# Altium PCB Main.PcbDoc (part 1 of 2)
Units mil, origin at the board's own origin, x right, y up, seen from the top; angles counter-clockwise.
Board outline 5500 x 5000 mil, 4 copper layers (Top Layer, Gnd 1, Interconnects, Gnd 2), stack 65.2 mil thick; 154 components, 128 nets, 570 pads, 1105 vias.
Unrouted connection lines stored in the file: 1.
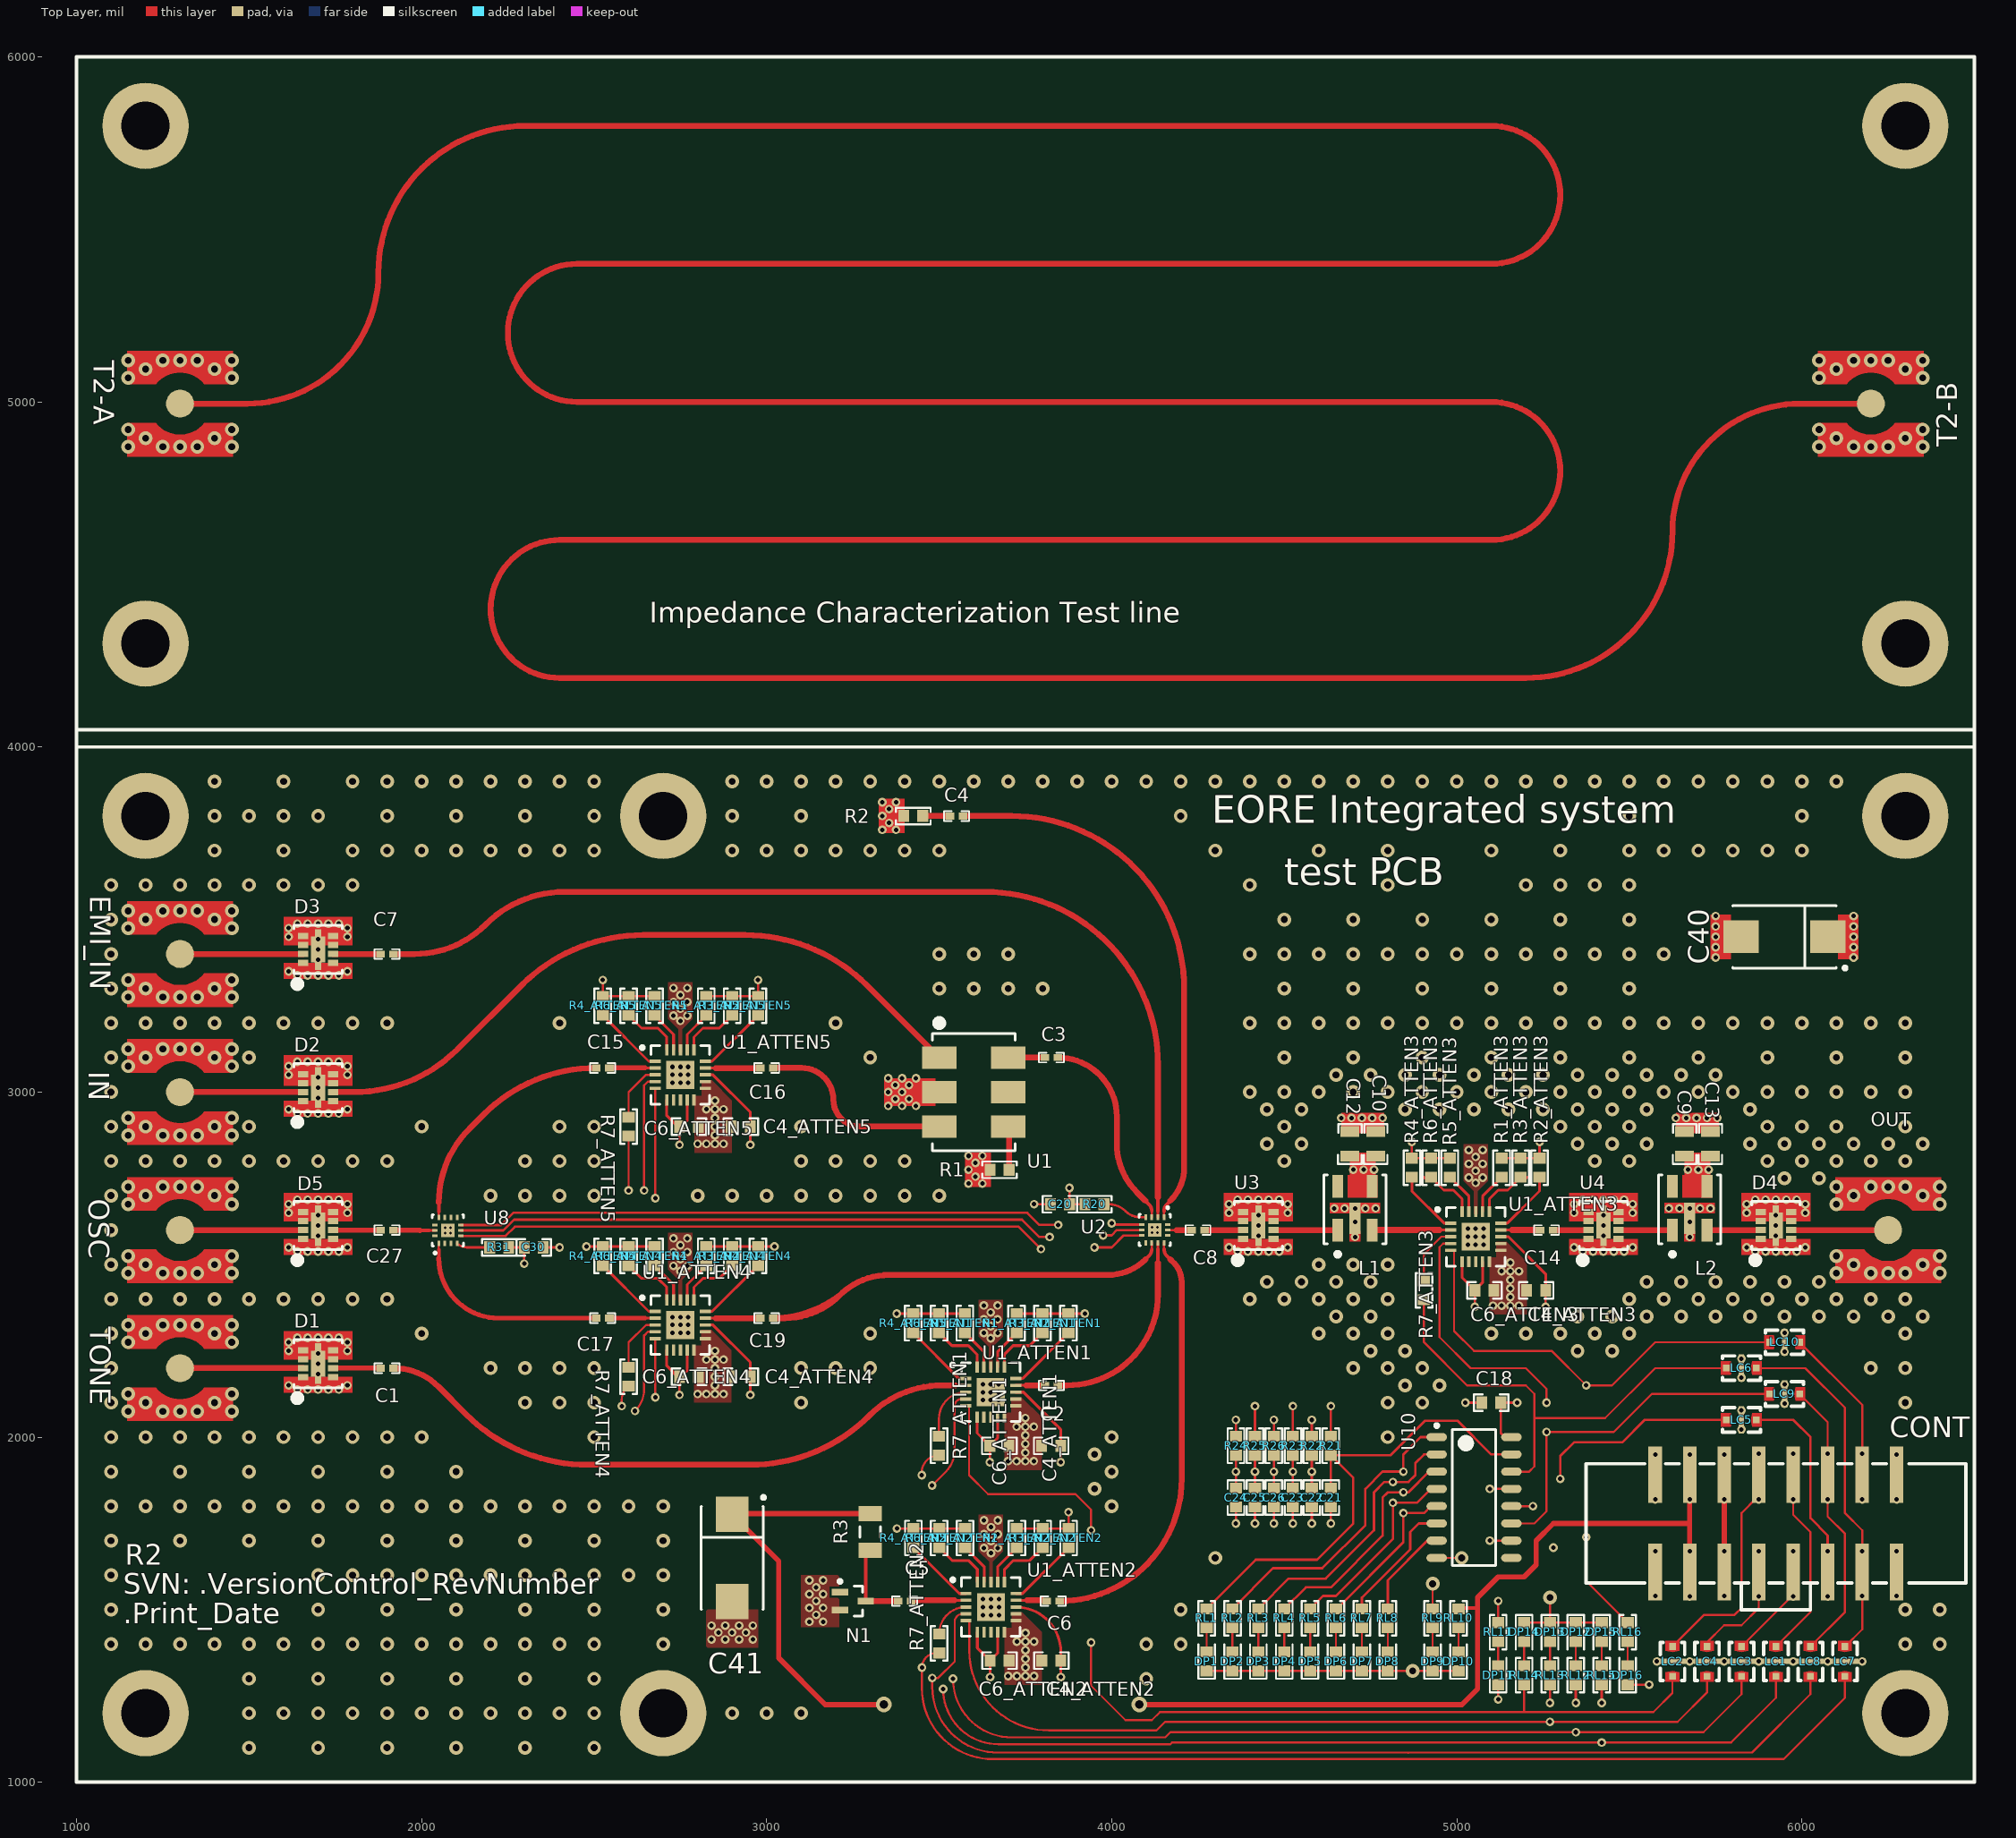
[diagram p0: Top Layer view]
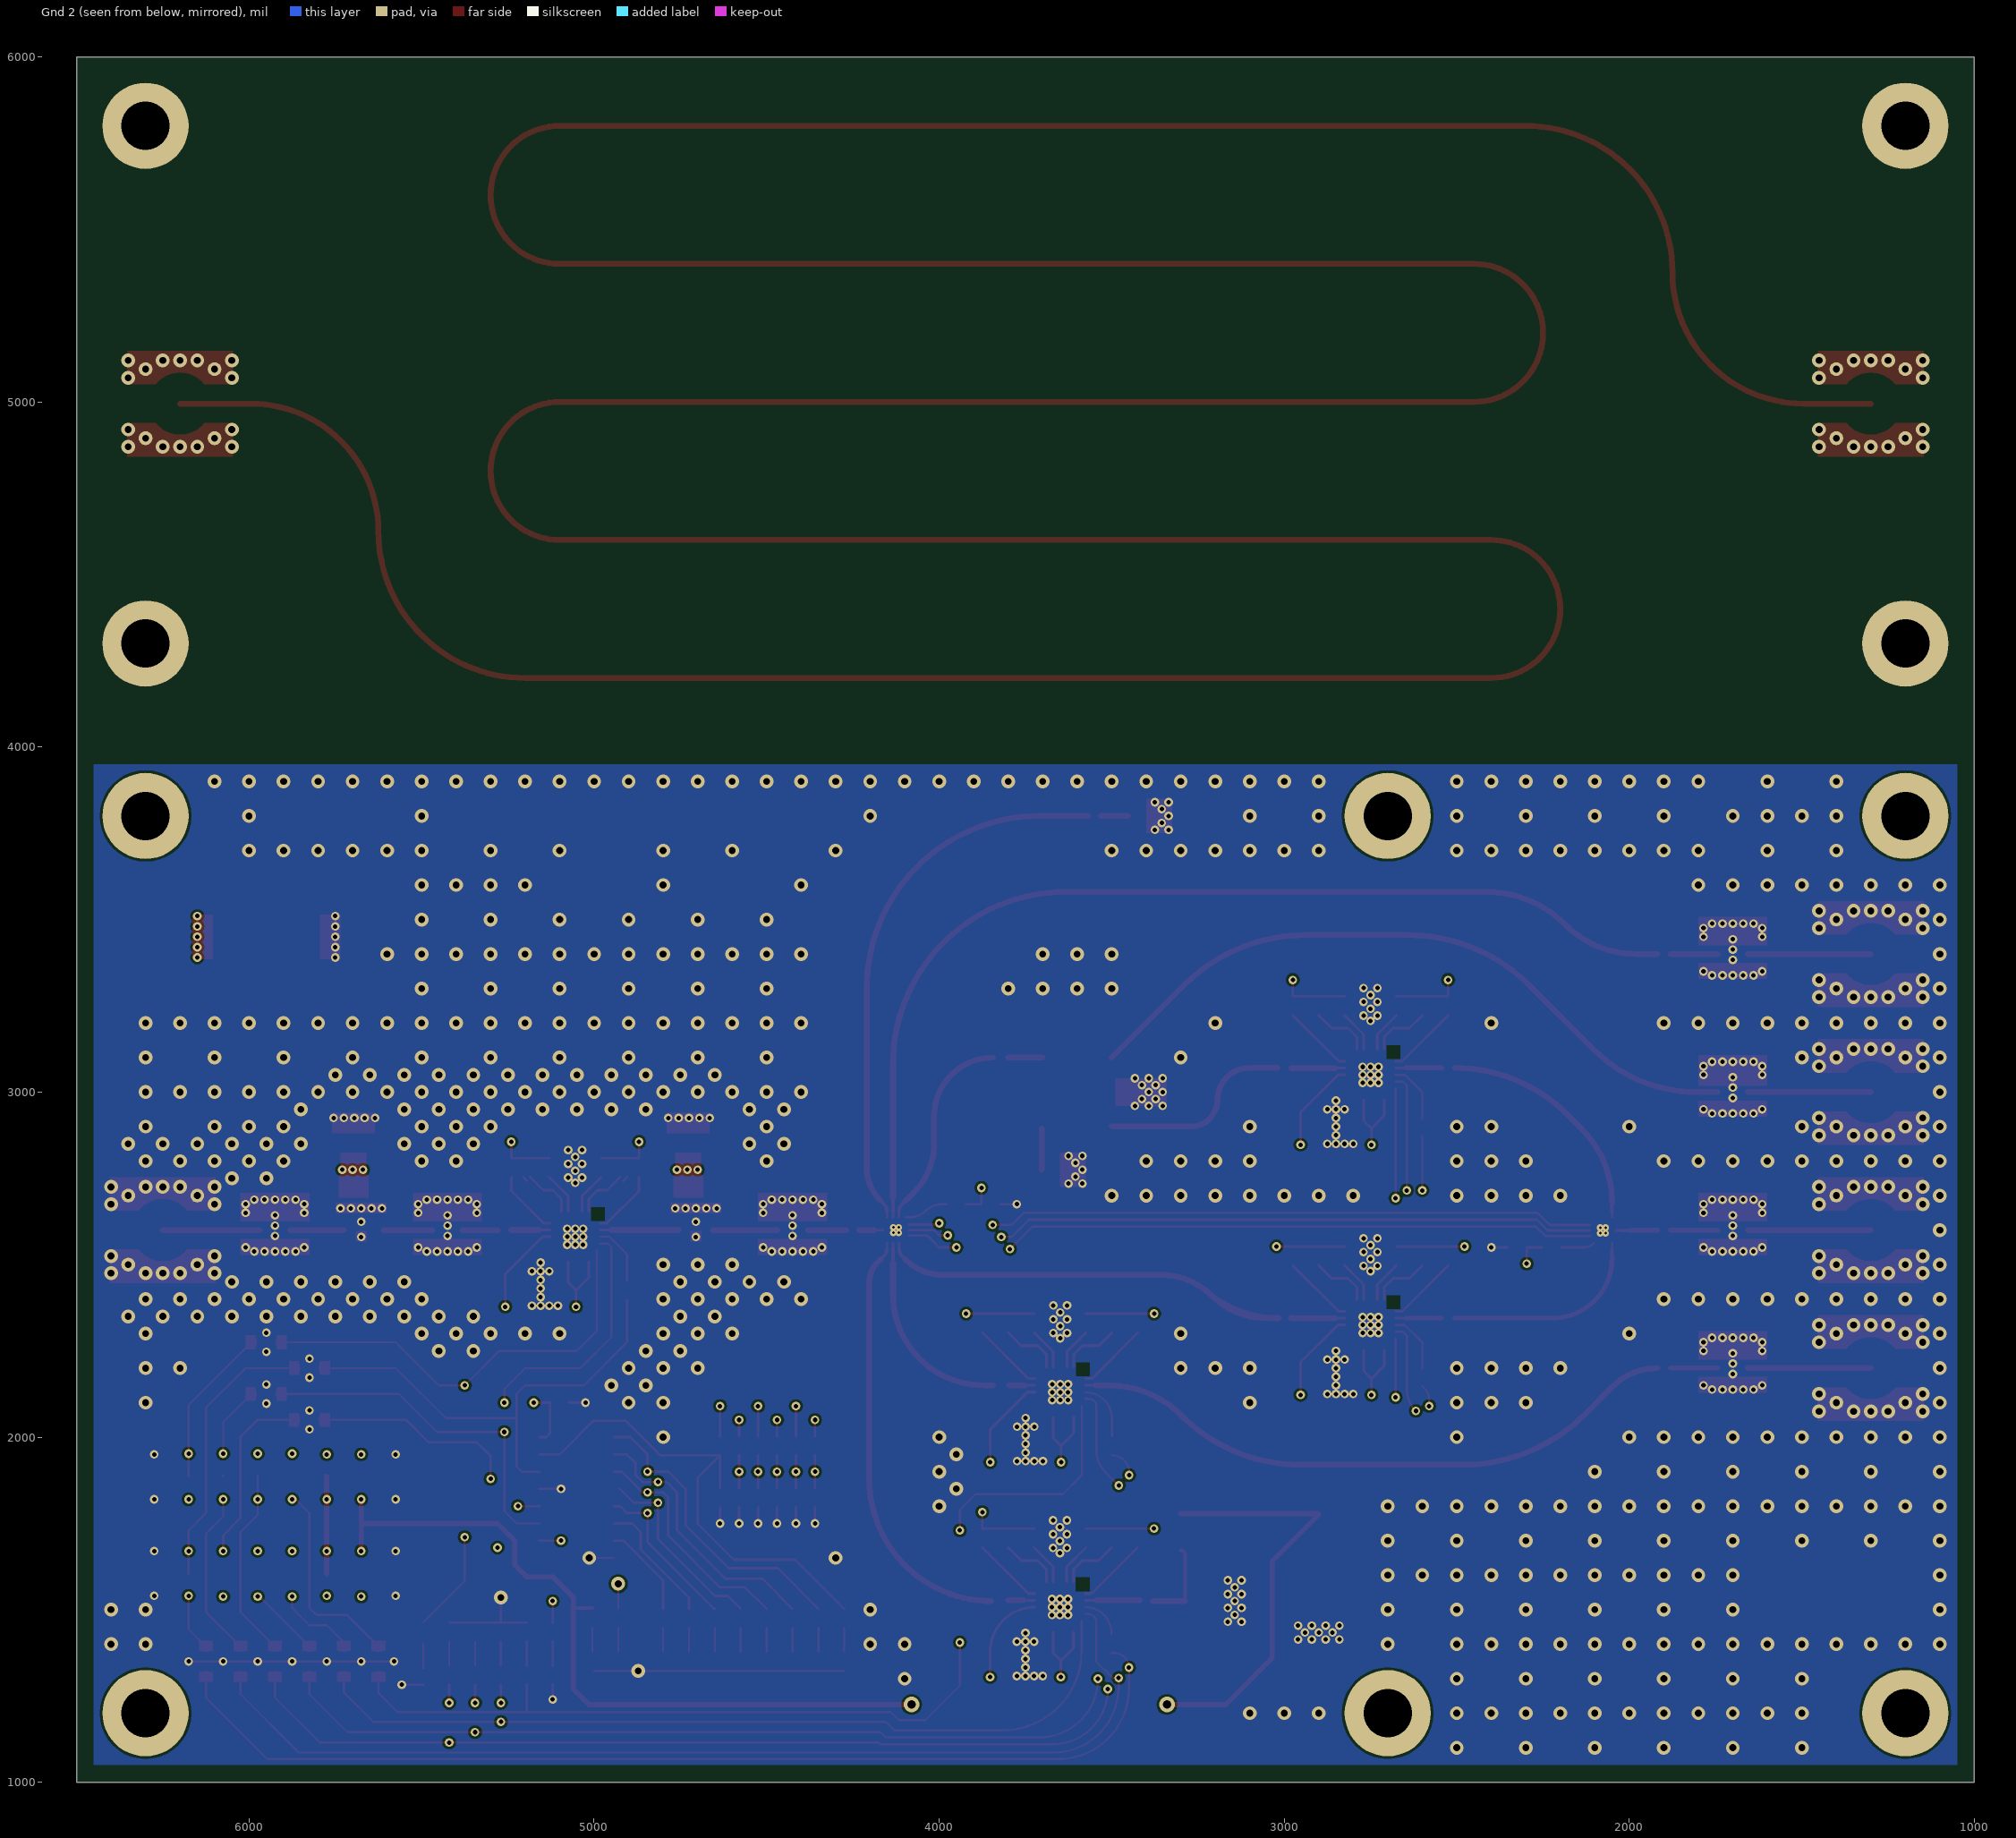
[diagram p1: Gnd 2 view, seen from below]
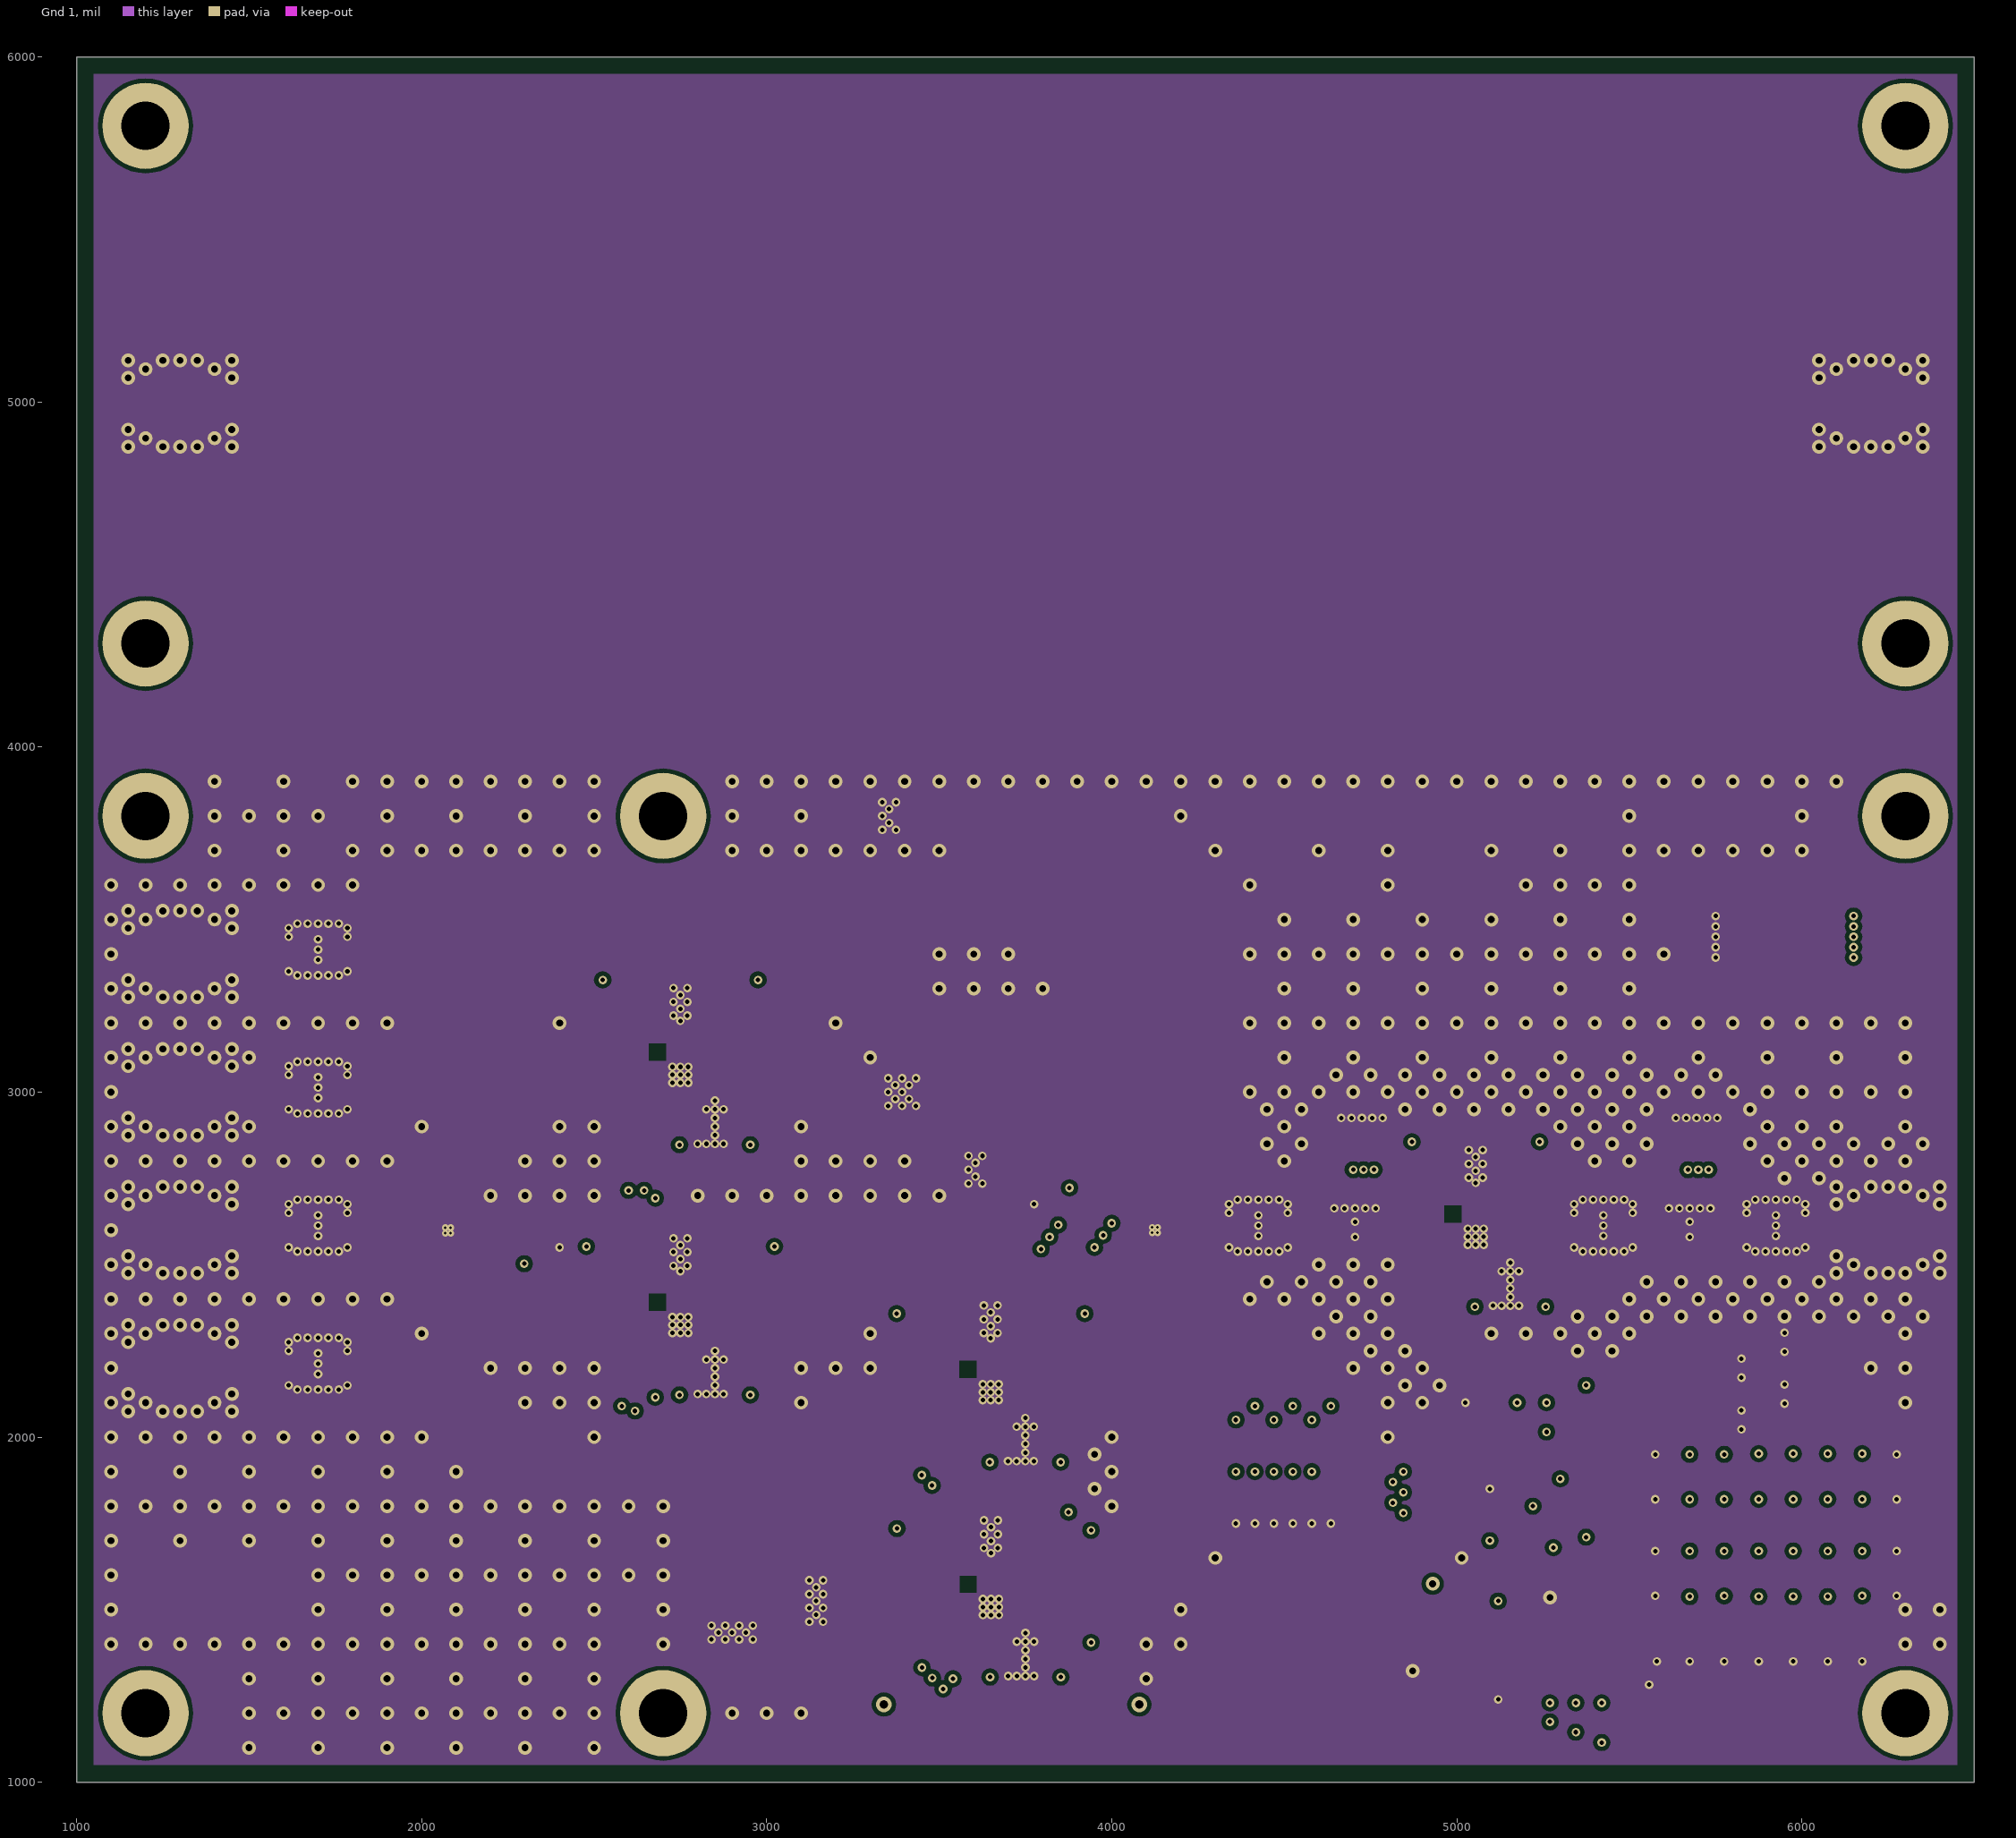
[diagram p2: Gnd 1]
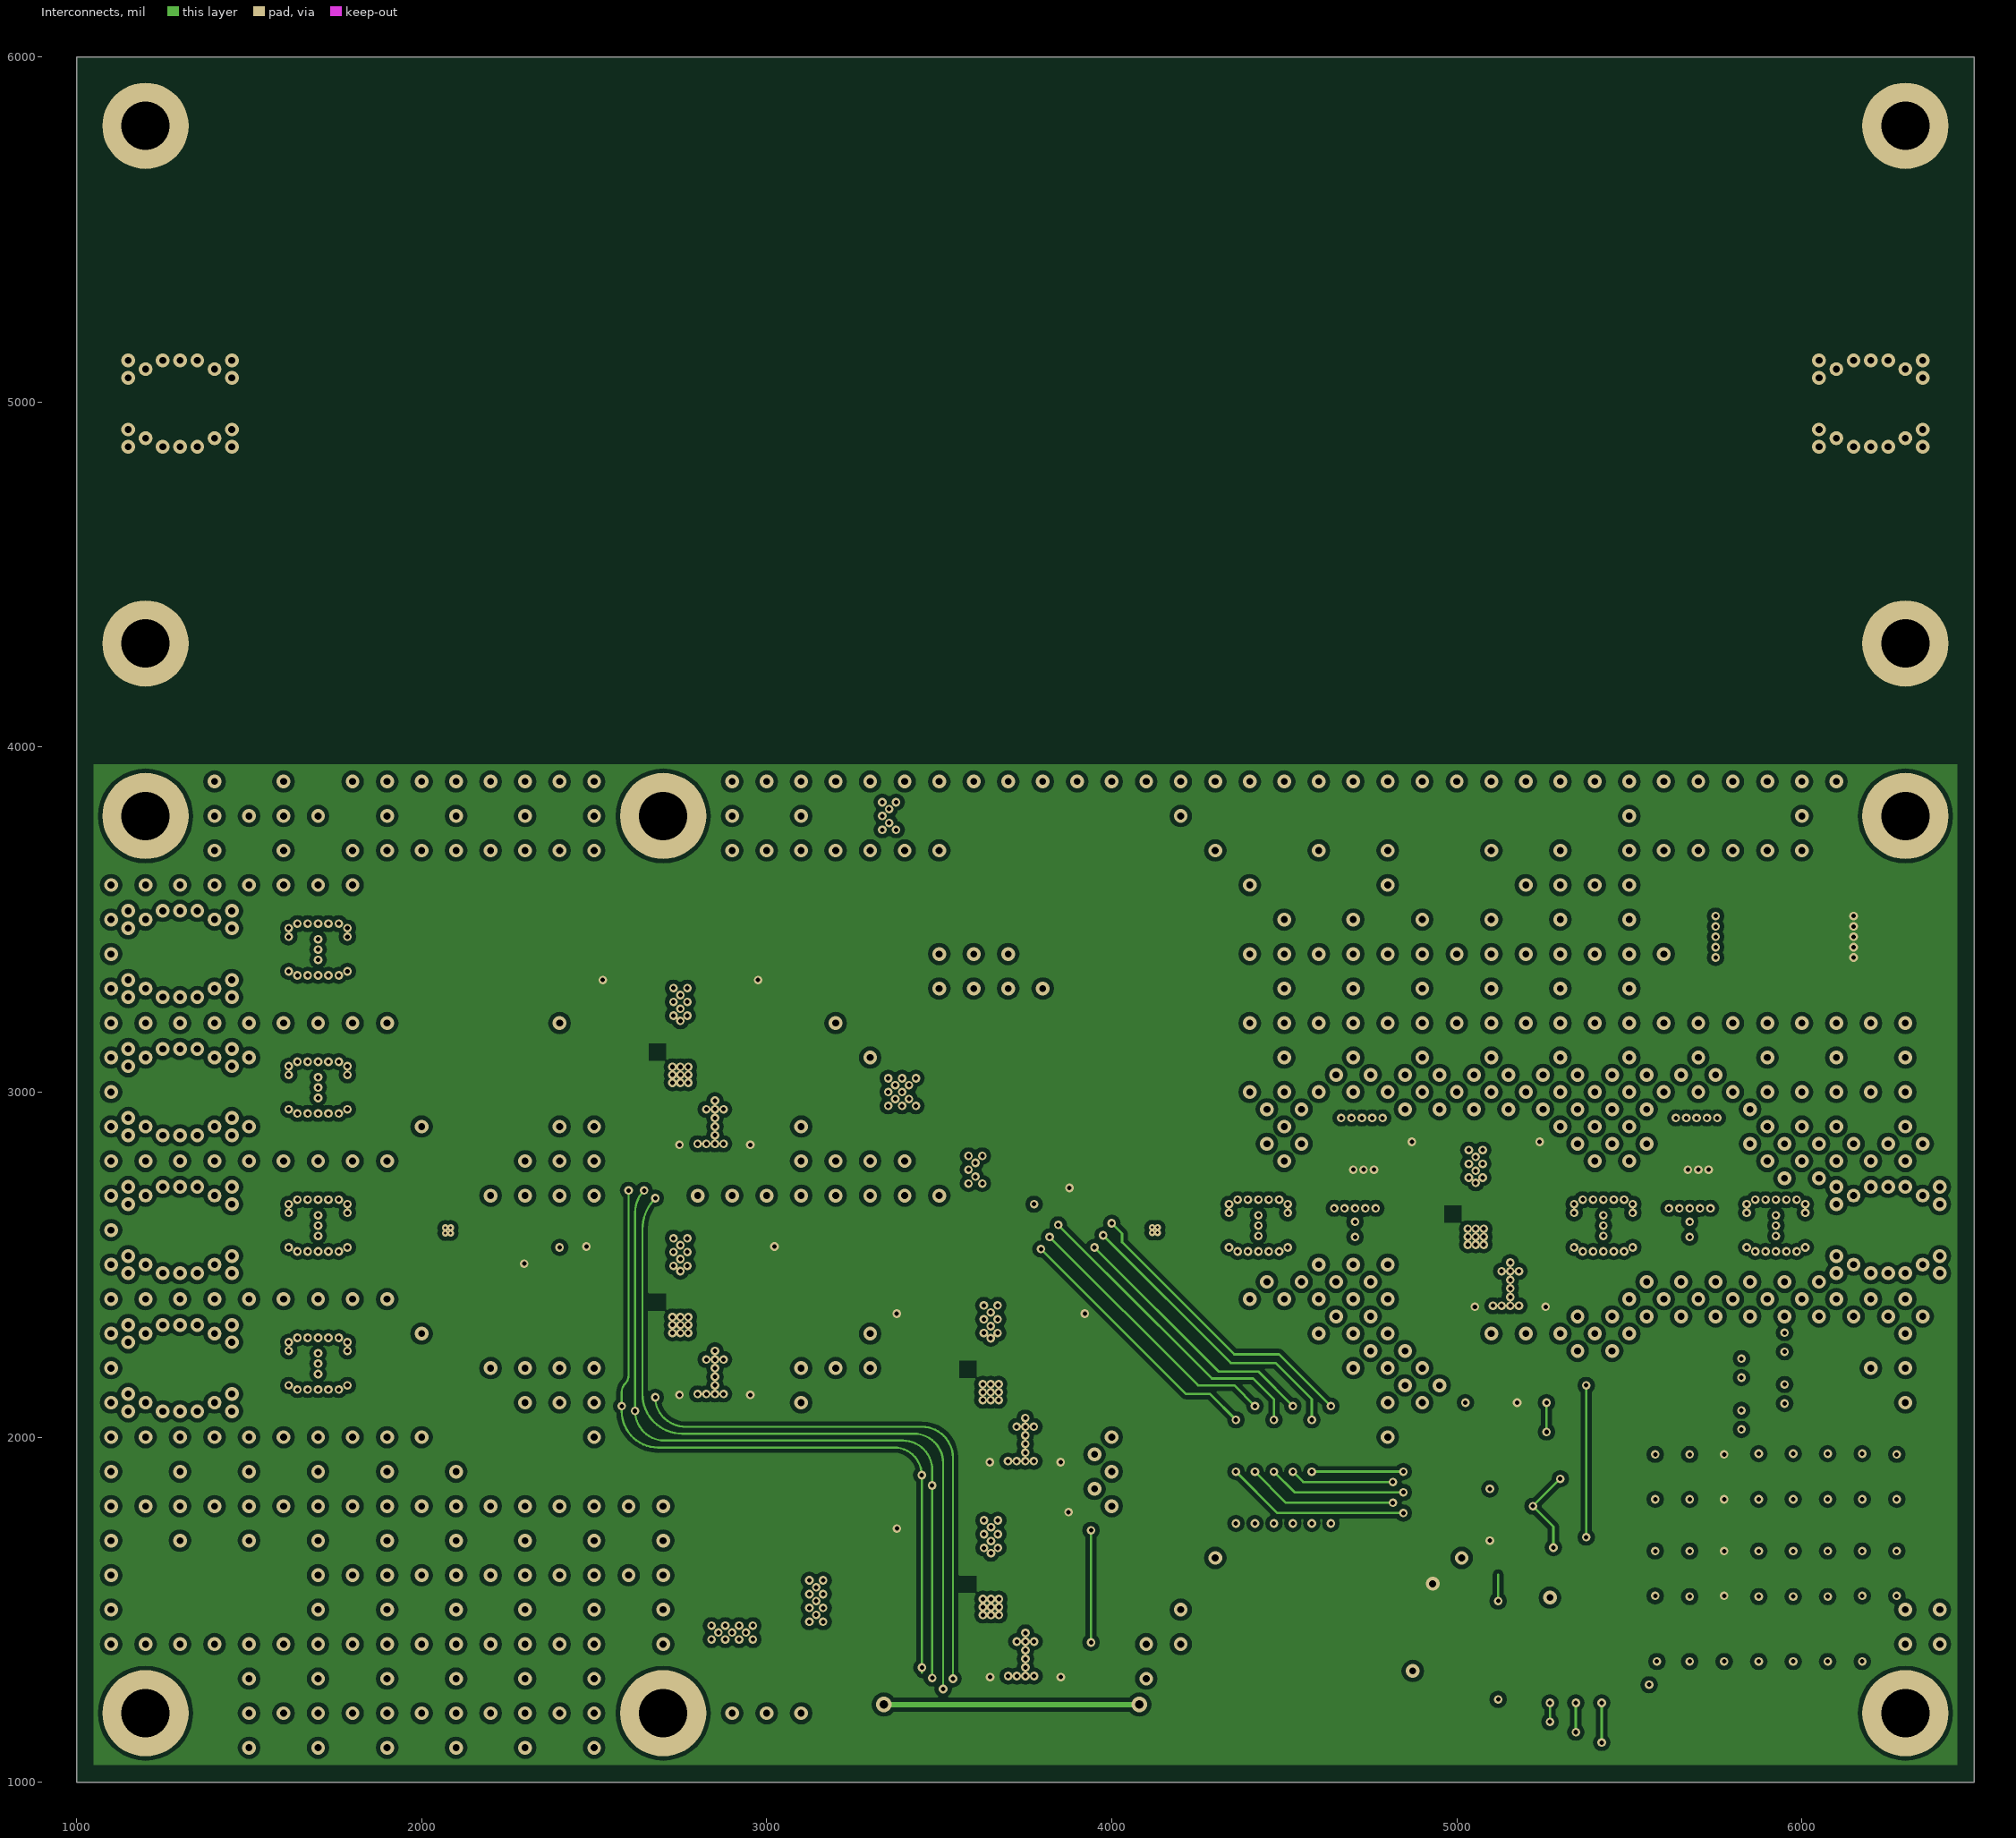
[diagram p3: Interconnects]

## Layer stack, top to bottom
Top Layer: signal copper 1.4
Dielectric: prepreg 9.8, FR-4, Dk 4.56
Gnd 1: signal copper 1.4
Dielectric: core 40, FR-4, Dk 4.8
Interconnects: signal copper 1.4
Dielectric: prepreg 9.8, FR-4, Dk 4.8
Gnd 2: signal copper 1.4

## Board outline
1000,1000 6500,1000 6500,6000 1000,6000

## Design rules (kind name [scope] priority, off if disabled: settings)
Clearance Clearance_1 [OnLayer('GND 1') OR onLayer('Interconnects')] p1: gap=12
Clearance "Clearance Poly" [InPolygon] p2: gap=7
Clearance [All] p3: gap=6
FlightTimeFalling [All] p1: maximum=1.000n
FlightTimeRising [All] p1: maximum=1.000n
HoleSize [All] p1: absolutevalues=TRUE maxlimit=500 minlimit=1 maxpercent=80.000 minpercent=20.000
HoleSize Testpoint [All] p2 off: absolutevalues=TRUE maxlimit=100 minlimit=1 maxpercent=80.000 minpercent=20.000
HoleSize TestPointUsage [All] p3 off: absolutevalues=TRUE maxlimit=100 minlimit=1 maxpercent=80.000 minpercent=20.000
MinimumAnnularRing [All] p1: minimumring=5
MinimumSolderMaskSliver [All] p1 off: minsoldermaskwidth=10
MinimumSolderMaskSliver SilkscreenOverComponentPads [All] p2 off: minsoldermaskwidth=10
OvershootFalling [All] p1: maximum=330.0m
OvershootRising [All] p1: maximum=330.0m
ParallelSegment [All] p1 off: limit=10000 gap=10
PlaneConnect [All] p1: planeconnectstyle=Direct reliefexpansion=20 reliefentries=4 reliefconductorwidth=10 reliefairgap=10
PolygonConnect Heatsink [InNet('GND') vs InNet('GND')] p1: connectstyle=Direct reliefconductorwidth=10 reliefentries=4 polygonreliefangle="90 Angle" airgapwidth=10
PolygonConnect [All] p2: connectstyle=Direct reliefconductorwidth=10 reliefentries=4 polygonreliefangle="90 Angle" airgapwidth=10
RoomDefinition ATTEN5 [InComponentClass('ATTEN5')] p1 off: confinementstyle=ConfineIn formatcopy=TRUE lockcomponents=FALSE outline 9490,3870 11245,3870 11245,4190 9490,4190
RoomDefinition ATTEN4 [InComponentClass('ATTEN4')] p2 off: confinementstyle=ConfineIn formatcopy=TRUE lockcomponents=FALSE outline 9480,3505 11235,3505 11235,3825 9480,3825
RoomDefinition Main [InComponentClass('Main')] p3 off: confinementstyle=ConfineIn formatcopy=TRUE lockcomponents=FALSE outline 7300,4350 7300,2378.98 9084,2378.98 9084,4350
RoomDefinition ATTEN3 [InComponentClass('ATTEN3')] p4: confinementstyle=ConfineIn formatcopy=TRUE lockcomponents=FALSE outline 4830,2333.84 5453.76,2333.84 5453.76,2858.84 4830,2858.84
RoomDefinition ATTEN2 [InComponentClass('ATTEN2')] p5: confinementstyle=ConfineIn formatcopy=TRUE lockcomponents=FALSE outline 3350.02,1260.63 3948.78,1260.63 3948.78,1785.63 3350.02,1785.63
RoomDefinition ATTEN1 [InComponentClass('ATTEN1')] p6: confinementstyle=ConfineIn formatcopy=TRUE lockcomponents=FALSE outline 3349.44,1883.4 3948.2,1883.4 3948.2,2408.4 3349.44,2408.4
RoutingVias [All] p1: holewidth=15 width=30 viastyle="Through Hole" minholewidth=10 minwidth=20 maxholewidth=250 maxwidth=500
SignalStimulus [All] p1: kind=2 level=0 starttime=10.00n stoptime=60.00n periodtime=100.00n
SilkToSilkClearance [All] p1 off: silktosilkclearance=10
SilkToSolderMaskClearance [IsPad] p1 off: minsilkscreentomaskgap=10 clearancetoexposedcopper=TRUE
SolderMaskExpansion [All] p1: expansion=4
SupplyNets [All] p1: voltage=3.300
UndershootFalling [All] p1: maximum=330.0m
UndershootRising [All] p1: maximum=330.0m
Width Width_General [All] p1: maxlimit=250 minlimit=6 preferedwidth=10
Width "Width Differential Pair" [(InDifferentialPairClass('All Differential Pairs'))] p2: maxlimit=26.05 minlimit=1.49 preferedwidth=18.35 toplayer_maxwidth=4.34 toplayer_prefwidth=2.69 midlayer1_minwidth=3.62 midlayer1_maxwidth=7.77 midlayer1_prefwidth=5.4 midlayer2_minwidth=9.66 midlayer2_maxwidth=20.06 midlayer2_prefwidth=14.02 bottomlayer_minwidth=12.79 impedancedriven=TRUE minimp=80.000000 maximp=100.000000 favimp=90.000000
23 further rules are at their usual default settings.

## Classes and differential pairs
component class ATTEN5: C4_ATTEN5 C6_ATTEN5 R1_ATTEN5 R2_ATTEN5 R3_ATTEN5 R4_ATTEN5 R5_ATTEN5 R6_ATTEN5 R7_ATTEN5 U1_ATTEN5
component class ATTEN4: C4_ATTEN4 C6_ATTEN4 R1_ATTEN4 R2_ATTEN4 R3_ATTEN4 R4_ATTEN4 R5_ATTEN4 R6_ATTEN4 R7_ATTEN4 U1_ATTEN4
component class Main: C1 C2 C3 C4 C5 C6 C7 C8 C9 C10 C12 C13 C14 C15 C16 C17 C18 C19 C20 C21 C22 C23 C24 C25 C26 C27 C30 C40 C41 CONT D1 D2 D3 D4 D5 DP1 DP2 DP3 DP4 DP5 DP6 DP7 DP8 DP9 DP10 DP11 DP12 DP13 DP14 DP15 DP16 EMI_IN IN L1 L2 LC1 LC2 LC3 LC4 LC5 LC6 LC7 LC8 LC9 LC10 N1 OSC OUT R1 R2 R3 R20 R21 R22 R23 R24 R25 R26 R31 RL1 RL2 RL3 RL4 RL5 RL6 RL7 RL8 RL9 RL10 RL11 RL12 RL13 RL14 RL15 RL16 T2-A T2-B TONE U1 U2 U3 U4 U8 U10
component class ATTEN1: C4_ATTEN1 C6_ATTEN1 R1_ATTEN1 R2_ATTEN1 R3_ATTEN1 R4_ATTEN1 R5_ATTEN1 R6_ATTEN1 R7_ATTEN1 U1_ATTEN1
component class ATTEN2: C4_ATTEN2 C6_ATTEN2 R1_ATTEN2 R2_ATTEN2 R3_ATTEN2 R4_ATTEN2 R5_ATTEN2 R6_ATTEN2 R7_ATTEN2 U1_ATTEN2
component class ATTEN3: C4_ATTEN3 C6_ATTEN3 R1_ATTEN3 R2_ATTEN3 R3_ATTEN3 R4_ATTEN3 R5_ATTEN3 R6_ATTEN3 R7_ATTEN3 U1_ATTEN3
channel class Attenuator: ATTEN1 ATTEN2 ATTEN3

## Components (designator, comment, footprint, x,y, rotation, side; value= is the part's Value field where it differs from the comment)
C1 "Cap" 0402C 1900,2200 r0 top
C2 "Cap" 0402C 3825,2150 r0 top
C3 "Cap" 0402C 3825,3100 r0 top
C4 "Cap" 0402C 3550,3800 r0 top
C4_ATTEN1 "SMT Cap" 0603C 3824.44,1975 r0 top (schematic designator C4)
C4_ATTEN2 "SMT Cap" 0603C 3825.02,1352.23 r0 top (schematic designator C4)
C4_ATTEN3 "SMT Cap" 0603C 5230,2425.44 r0 top (schematic designator C4)
C4_ATTEN4 "SMT Cap" 0603C 2925,2175 r0 top (schematic designator C4)
C4_ATTEN5 "SMT Cap" 0603C 2925,2900 r0 top (schematic designator C4)
C5 "Cap" 0402C 3400,1525 r0 top
C6 "Cap" 0402C 3830,1525 r0 top
C6_ATTEN1 "SMT Cap" 0603C 3674.44,1975 r180 top (schematic designator C6)
C6_ATTEN2 "SMT Cap" 0603C 3675.02,1352.23 r180 top (schematic designator C6)
C6_ATTEN3 "SMT Cap" 0603C 5080,2425.44 r180 top (schematic designator C6)
C6_ATTEN4 "SMT Cap" 0603C 2775,2175 r180 top (schematic designator C6)
C6_ATTEN5 "SMT Cap" 0603C 2775,2900 r180 top (schematic designator C6)
C7 "Cap" 0402C 1900,3400 r0 top
C8 "Cap" 0402C 4250,2600 r0 top
C9 "Cap" 0805C 5660,2850 r270 top
C10 "Cap" 0805C 4765,2850 r270 top
C12 "Cap" 0805C 4690,2850 r270 top
C13 "Cap" 0805C 5735,2850 r270 top
C14 "Cap" 0402C 5260,2600 r0 top
C15 "Cap" 0402C 2525,3070 r0 top
C16 "Cap" 0402C 3000,3070 r0 top
C17 "Cap" 0402C 2525,2345 r0 top
C18 "Cap" 0603C 5100,2100 r0 top
C19 "Cap" 0402C 3000,2345 r0 top
C20 "SMT Cap" 0603C 3850,2675 r0 top
C21 "SMT Cap" 0603C 4635,1825 r90 top
C22 "SMT Cap" 0603C 4580,1825 r90 top
C23 "SMT Cap" 0603C 4525,1825 r90 top
C24 "SMT Cap" 0603C 4360,1825 r90 top
C25 "SMT Cap" 0603C 4415,1825 r90 top
C26 "SMT Cap" 0603C 4470,1825 r90 top
C27 "Cap" 0402C 1900,2600 r0 top
C30 "SMT Cap" 0603C 2325,2550 r180 top
C40 "SMT Cap" V 5950,3450 r180 top
C41 "SMT Cap" V 2900,1650 r270 top
CONT "Header 8X2" "SMT 16-pin rectangular header" 5925,1750 r0 top
D1 "CLM-83-2W" DL1721 1700,2213 r0 top
D2 "CLM-83-2W" DL1721 1700,3013 r0 top
D3 "CLM-83-2W" DL1721 1700,3413 r0 top
D4 "CLM-83-2W" DL1721 5925,2613 r0 top
D5 "CLM-83-2W" DL1721 1700,2613 r0 top
DP1 "LED0" "0603 SMT LED" 4275,1350 r90 top
DP2 "LED0" "0603 SMT LED" 4350,1350 r90 top
DP3 "LED0" "0603 SMT LED" 4425,1350 r90 top
DP4 "LED0" "0603 SMT LED" 4500,1350 r90 top
DP5 "LED0" "0603 SMT LED" 4575,1350 r90 top
DP6 "LED0" "0603 SMT LED" 4650,1350 r90 top
DP7 "LED0" "0603 SMT LED" 4725,1350 r90 top
DP8 "LED0" "0603 SMT LED" 4800,1350 r90 top
DP9 "LED0" "0603 SMT LED" 4930,1350 r90 top
DP10 "LED0" "0603 SMT LED" 5005,1350 r90 top
DP11 "LED0" "0603 SMT LED" 5120,1310 r90 top
DP12 "LED0" "0603 SMT LED" 5345,1435 r270 top
DP13 "LED0" "0603 SMT LED" 5270,1435 r270 top
DP14 "LED0" "0603 SMT LED" 5195,1435 r270 top
DP15 "LED0" "0603 SMT LED" 5420,1435 r270 top
DP16 "LED0" "0603 SMT LED" 5495,1310 r90 top
EMI_IN "COAX-M" "SMT RA SMA Connector"#1 1300,3400 r90 top
IN "COAX-M" "SMT RA SMA Connector"#1 1300,3000 r270 top
L1 "TCBT-14" GU1414 4705,2600 r0 top
L2 "TCBT-14" GU1414 5675,2600 r0 top
LC1 "MEM2012F" "MEM2012S LC Filter" 5925,1350 r90 top
LC2 "MEM2012F" "MEM2012S LC Filter" 5625,1350 r90 top
LC3 "MEM2012F" "MEM2012S LC Filter" 5825,1350 r90 top
LC4 "MEM2012F" "MEM2012S LC Filter" 5725,1350 r90 top
LC5 "MEM2012F" "MEM2012S LC Filter" 5825,2050 r0 top
LC6 "MEM2012F" "MEM2012S LC Filter" 5825,2200 r0 top
LC7 "MEM2012F" "MEM2012S LC Filter" 6125,1350 r90 top
LC8 "MEM2012F" "MEM2012S LC Filter" 6025,1350 r90 top
LC9 "MEM2012F" "MEM2012S LC Filter" 5950,2125 r0 top
LC10 "MEM2012F" "MEM2012S LC Filter" 5950,2275 r0 top
N1 "NC303SOT" SOT323-3AN 3250,1525 r0 top
OSC "COAX-M" "SMT RA SMA Connector"#1 1300,2600 r90 top
OUT "COAX-M" "SMT RA SMA Connector"#1 6250,2600 r270 top
R1 "FC0603-50BFCT-ND" 0603R 3675,2775 r0 top
R1_ATTEN1 "RES Semi" 0603R 3724.43,2330.33 r90 top (schematic designator R1)
R1_ATTEN2 "RES Semi" 0603R 3725,1707.56 r90 top (schematic designator R1)
R1_ATTEN3 "RES Semi" 0603R 5129.98,2780.77 r90 top (schematic designator R1)
R1_ATTEN4 "RES Semi" 0603R 2825,2525 r90 top (schematic designator R1)
R1_ATTEN5 "RES Semi" 0603R 2825,3250 r90 top (schematic designator R1)
R2 "FC0603-50BFCT-ND" 0603R 3425,3800 r0 top
R2_ATTEN1 "RES Semi" 0603R 3874.43,2330.33 r90 top (schematic designator R2)
R2_ATTEN2 "RES Semi" 0603R 3875,1707.56 r90 top (schematic designator R2)
R2_ATTEN3 "RES Semi" 0603R 5239.98,2780.77 r90 top (schematic designator R2)
R2_ATTEN4 "RES Semi" 0603R 2975,2525 r90 top (schematic designator R2)
R2_ATTEN5 "RES Semi" 0603R 2975,3250 r90 top (schematic designator R2)
R3 "Res Semi Small" 1206R 3300,1725 r90 top
R3_ATTEN1 "RES Semi" 0603R 3799.43,2330.33 r90 top (schematic designator R3)
R3_ATTEN2 "RES Semi" 0603R 3800,1707.56 r90 top (schematic designator R3)
R3_ATTEN3 "RES Semi" 0603R 5184.98,2780.77 r90 top (schematic designator R3)
R3_ATTEN4 "RES Semi" 0603R 2900,2525 r90 top (schematic designator R3)
R3_ATTEN5 "RES Semi" 0603R 2900,3250 r90 top (schematic designator R3)
R4_ATTEN1 "RES Semi" 0603R 3424.43,2330.33 r90 top (schematic designator R4)
R4_ATTEN2 "RES Semi" 0603R 3425,1707.56 r90 top (schematic designator R4)
R4_ATTEN3 "RES Semi" 0603R 4869.98,2780.77 r90 top (schematic designator R4)
R4_ATTEN4 "RES Semi" 0603R 2525,2525 r90 top (schematic designator R4)
R4_ATTEN5 "RES Semi" 0603R 2525,3250 r90 top (schematic designator R4)
R5_ATTEN1 "RES Semi" 0603R 3574.43,2330.33 r90 top (schematic designator R5)
R5_ATTEN2 "RES Semi" 0603R 3575,1707.56 r90 top (schematic designator R5)
R5_ATTEN3 "RES Semi" 0603R 4979.98,2780.77 r90 top (schematic designator R5)
R5_ATTEN4 "RES Semi" 0603R 2675,2525 r90 top (schematic designator R5)
R5_ATTEN5 "RES Semi" 0603R 2675,3250 r90 top (schematic designator R5)
R6_ATTEN1 "RES Semi" 0603R 3499.43,2330.33 r90 top (schematic designator R6)
R6_ATTEN2 "RES Semi" 0603R 3500,1707.56 r90 top (schematic designator R6)
R6_ATTEN3 "RES Semi" 0603R 4924.98,2780.77 r90 top (schematic designator R6)
R6_ATTEN4 "RES Semi" 0603R 2600,2525 r90 top (schematic designator R6)
R6_ATTEN5 "RES Semi" 0603R 2600,3250 r90 top (schematic designator R6)
R7_ATTEN1 "RES Semi" 0603R 3499.44,1975 r270 top (schematic designator R7)
R7_ATTEN2 "RES Semi" 0603R 3500.02,1402.23 r270 top (schematic designator R7)
R7_ATTEN3 "RES Semi" 0603R 4905,2425.44 r270 top (schematic designator R7)
R7_ATTEN4 "RES Semi" 0603R 2600,2175 r270 top (schematic designator R7)
R7_ATTEN5 "RES Semi" 0603R 2600,2900 r270 top (schematic designator R7)
R20 "RES Semi" 0603R 3950,2675 r180 top
R21 "RES Semi" 0603R 4635,1975 r270 top
R22 "RES Semi" 0603R 4580,1975 r270 top
R23 "RES Semi" 0603R 4525,1975 r270 top
R24 "RES Semi" 0603R 4360,1975 r90 top
R25 "RES Semi" 0603R 4415,1975 r90 top
R26 "RES Semi" 0603R 4470,1975 r90 top
R31 "RES Semi" 0603R 2225,2550 r0 top
RL1 "Res Semi Small" 0603R 4275,1475 r270 top
RL2 "Res Semi Small" 0603R 4350,1475 r270 top
RL3 "Res Semi Small" 0603R 4425,1475 r270 top
RL4 "Res Semi Small" 0603R 4500,1475 r270 top
RL5 "Res Semi Small" 0603R 4575,1475 r270 top
RL6 "Res Semi Small" 0603R 4650,1475 r270 top
RL7 "Res Semi Small" 0603R 4725,1475 r270 top
RL8 "Res Semi Small" 0603R 4800,1475 r270 top
RL9 "Res Semi Small" 0603R 4930,1475 r270 top
RL10 "Res Semi Small" 0603R 5005,1475 r270 top
RL11 "Res Semi Small" 0603R 5120,1435 r270 top
RL12 "Res Semi Small" 0603R 5345,1310 r90 top
RL13 "Res Semi Small" 0603R 5270,1310 r90 top
RL14 "Res Semi Small" 0603R 5195,1310 r90 top
RL15 "Res Semi Small" 0603R 5420,1310 r90 top
RL16 "Res Semi Small" 0603R 5495,1435 r270 top
T2-A "COAX-M" "SMT RA SMA Connector"#2 1300,4995 r90 top
T2-B "COAX-M" "SMT RA SMA Connector"#2 6200,4995 r90 top
TONE "COAX-M" "SMT RA SMA Connector"#1 1300,2200 r270 top
U1 "ADC-10-4" CD542 3600,3000 r270 top
U1_ATTEN1 "DAT-31R5-SP" QFN50P400X400X90_HS-21N 3649.43,2130.33 r0 top (schematic designator U1)
U1_ATTEN2 "DAT-31R5-SP" QFN50P400X400X90_HS-21N 3650,1507.56 r0 top (schematic designator U1)
U1_ATTEN3 "DAT-31R5-SP" QFN50P400X400X90_HS-21N 5054.98,2580.77 r0 top (schematic designator U1)
U1_ATTEN4 "DAT-31R5-SP" QFN50P400X400X90_HS-21N 2750,2325 r0 top (schematic designator U1)
U1_ATTEN5 "DAT-31R5-SP" QFN50P400X400X90_HS-21N 2750,3050 r0 top (schematic designator U1)
U2 "SP6T RF Switch" MT1817 4125,2600 r270 top
U3 "CMA-5043" DL1721 4425,2613 r0 top
U4 "CMA-5043" DL1721 5425,2613 r0 top
U8 "SP6T RF Switch" MT1817 2076.42,2598.94 r90 top
U10 "SN74LS595N" SOIC127P602-16BN 5050,1825 r0 top

## Footprints (in the part's own frame and the unit in brackets; to place one, negate y for a bottom-side part, rotate by r counter-clockwise, add the part's x,y. Pads: shape width x height; smd on the part's side, far side on the other; paste and mask are expansions set on the pad)
0402C [mil]
  rect 25x20 smd: 1(-19.02,0) 2(19.02,0)
  silkscreen extent -36,-14 36,14, body extent -36,-14 36,14
"0603 SMT LED" [mm]
  rect 0.8x0.9 smd: 1(0.7,0) 2(-0.7,0)
  silkscreen extent -1.27,-0.61 1.27,0.61, body extent -0.87,-0.48 0.87,0.48, height 1.3
0603C [mm] "0603 Size Capacitor"
  rect 0.8x0.9 smd: 1(-0.7,0) 2(0.7,0)
  silkscreen extent -1.27,-0.61 1.27,0.61, body extent -0.87,-0.48 0.87,0.48, height 1.3
0603R [mm]
  rect 0.8x0.9 smd: 1(-0.7,0) 2(0.7,0)
  silkscreen extent -1.27,-0.61 1.27,0.61, body extent -0.87,-0.48 0.87,0.48, height 1.3
0805C [mm]
  rect 0.8x1.4 smd: 1(-0.9,0) 2(0.9,0)
  silkscreen extent -1.45,-0.86 1.47,0.86, body extent -1.1,-0.72 1.1,0.72, height 1.4
1206R [mm] "1206 Chip Resistor"
  rect 1.1x1.7 smd: 1(-1.35,0) 2(1.35,0)
  silkscreen extent -0.4,-0.75 0.4,0.75, body extent -1.7,-0.9 1.7,0.9, height 1.3
CD542 [mm] "Mini-Circuits CD542 Package"
  rect 1.65x2.54 smd paste-0.1: 1(-2.54,-2.54) 2(0,-2.54) 3(2.54,-2.54) 4(2.54,2.54) 5(0,2.54) 6(-2.54,2.54)
  silkscreen extent -5.33,-3.05 4.32,3.05, body extent -3.94,-2.79 3.94,2.79, height 3
DL1721 [mm] "DL1721 Mini-Circuits Device Pachage"
  rect 0.76x0.46 smd paste-0.1: 1(-1.11,-0.99) 2(-1.11,-0.33) 3(-1.11,0.33) 4(-1.11,0.99) 5(1.11,0.99) 6(1.11,0.33) 7(1.11,-0.33) 8(1.11,-0.99)
  rect 1.04x1.91 smd paste-0.1: 9(0,0)
  rect 0.46x3 smd paste-0.1: 10(0,0)
  silkscreen extent -1.78,-2.79 1.78,1.78, body extent -1.5,-1.5 1.5,1.5, height 1.14
GU1414 [mil] "Mini-Circuits GU1414 Case"
  rect 32x66 smd paste-3.94: 1(-50,0) 2(50,0) 3(50,127) 4(-50,127)
  rect 32x90 smd paste-3.94: 5(0,34)
  Top Layer region: -16,-33 16,-33 16,-2 -16,-2
  Top Layer region: -73,48 73,48 73,79 -73,79
  Top Layer region: -21,94 65,94 65,160 -21,160
  silkscreen extent -90,-75 90,160, body extent -75,-25 75,150, height 150
"MEM2012S LC Filter" [mm] "MEM2012S TDK LC Filter"
  rect 0.5x0.5 smd: 1(-1.1,0) 3(1.1,0)
  rect 0.4x2 smd: 2(0,0)
  Top Layer region: 1.5,0.5 1.5,-0.5 0.8,-0.5 0.7,0 0.8,0.5
  Top Layer region: -1.5,-0.5 -1.5,0.5 -0.8,0.5 -0.7,0 -0.8,-0.5
  silkscreen extent -1.4,-0.9 1.4,0.9, body extent -1.4,-0.7 1.4,0.7, height 0.85
MT1817 [mm] "Mini-Circuits MT1817 Package"
  rect 0.4x0.2 smd: 1(-0.95,0.675) 2(-0.95,0.225) 3(-0.95,-0.225) 4(-0.95,-0.675) 8(0.95,-0.675) 9(0.95,-0.225) 10(0.95,0.225) 11(0.95,0.675)
  rect 0.2x0.4 smd: 5(-0.4,-0.95) 6(0,-0.95) 7(0.4,-0.95) 12(0.4,0.95) 13(0,0.95) 14(-0.4,0.95)
  rect 1x1 smd: 15(0,0)
  silkscreen extent -1.7,-1.15 1.15,1.15, body extent -1,-1 1,1, height 0.55
QFN50P400X400X90_HS-21N [mm] "QFN, 20-Leads, Body 4.00x4.00mm, Pitch 0.50mm, Thermal Pad 2.06x2.06mm, IPC Medium Density"
  rect 0.635x0.635 on Keep-Out paste-0.1: 0(-1.676,1.676)
  rect 0.81x0.25 smd: 1(-1.845,1) 2(-1.845,0.5) 3(-1.845,0) 4(-1.845,-0.5) 5(-1.845,-1) 11(1.845,-1) 12(1.845,-0.5) 13(1.845,0) 14(1.845,0.5) 15(1.845,1)
  rect 0.25x0.81 smd: 6(-1,-1.845) 7(-0.5,-1.845) 8(0,-1.845) 9(0.5,-1.845) 10(1,-1.845) 16(1,1.845) 17(0.5,1.845) 18(0,1.845) 19(-0.5,1.845) 20(-1,1.845)
  rect 2.06x2.06 smd: 21(0,0)
  silkscreen extent -2.93,-2.15 2.15,2.15, body extent -2,-2 2,2, height 0.9
"SMT 16-pin rectangular header" [mil]
  rect 39x164 smd: 1(-350,-141) 2(-350,141) 3(-250,-141) 4(-250,141) 5(-150,-141) 6(-150,141) 7(-50,-141) 8(-50,141) 9(50,-141) 10(50,141) 11(150,-141) 12(150,141) 13(250,-141) 14(250,141) 15(350,-141) 16(350,141)
  silkscreen extent -550,-250 550,173, body extent -550,-173 550,173, height 358
"SMT RA SMA Connector"#1 [mil] "CONSMA002-SMD"
  round 81 smd paste-3.94: 1(0,0)
  round 40 hole 20 paste-3.94: 2(100,100) 3(100,-100) 4(-100,-100) 5(-100,100)
  Top Layer region: -56.5,70.06 -81.19,38.83 -90,0 -81.19,-38.83 -56.5,-70.06 -56.5,-70.06 -56.5,-70.06 -56.5,-153 -153,-153 -153,153 -56.5,153
  Top Layer region: 56.5,-70.06 81.19,-38.83 90,0 81.19,38.83 56.5,70.06 56.5,70.06 56.5,70.06 56.5,153 153,153 153,-153 56.5,-153
"SMT RA SMA Connector"#2 [mil] "CONSMA002-SMD"
  round 81 smd paste-100: 1(0,0)
  round 40 hole 20 paste-3.94: 2(100,100) 3(100,-100) 4(-100,-100) 5(-100,100)
  Top Layer region: 56.5,-70.06 81.19,-38.83 90,0 81.19,38.83 56.5,70.06 56.5,70.06 56.5,70.06 56.5,153 153,153 153,-153 56.5,-153
  Top Layer region: -56.5,70.06 -81.19,38.83 -90,0 -81.19,-38.83 -56.5,-70.06 -56.5,-70.06 -56.5,-70.06 -56.5,-153 -153,-153 -153,153 -56.5,153
SOIC127P602-16BN [mm] "SOIC, 16-Leads, Body 9.9x3.9mm, Pitch 1.27mm, IPC Medium Density"
  oval 1.5x0.6 smd: 1(-2.75,4.445) 2(-2.75,3.175) 3(-2.75,1.905) 4(-2.75,0.635) 5(-2.75,-0.635) 6(-2.75,-1.905) 7(-2.75,-3.175) 8(-2.75,-4.445) 9(2.75,-4.445) 10(2.75,-3.175) 11(2.75,-1.905) 12(2.75,-0.635) 13(2.75,0.635) 14(2.75,1.905) 15(2.75,3.175) 16(2.75,4.445)
  silkscreen extent -2.87,-5 1.6,5.42, body extent -3.1,-5 3.1,5, height 1.75
SOT323-3AN [mm] "SOT323, 3-Leads, Body 2.0x1.3mm, Pitch 0.65mm, Lead Span 2.1mm, IPC Medium Density"
  rect 1.2x0.5 smd: 1(-0.95,0.65) 2(-0.95,-0.65) 3(0.95,0)
  silkscreen extent -1.07,-1.1 0.7,1.57, body extent -0.7,-1.1 0.7,1.1, height 1
V [mm] "Capacitor, SM Tantalum; Body 7.3 x 4.3 mm (LxW typ)"
  rect 2.6x2.4 smd: 1(-3.2,0) 2(3.2,0)
  silkscreen extent -4.58,-2.3 3.8,2.42, body extent -3.78,-2.16 3.52,2.14, height 4.15

## Part data
C1 C2 C3 C4 C5 C6 C7 C8 C9 C10 C12 C13 C14 C15 C16 C17 C18 C19 C27: "Capacitor"
C4_ATTEN1 C4_ATTEN2 C4_ATTEN3 C4_ATTEN4 C4_ATTEN5 C6_ATTEN1 C6_ATTEN2 C6_ATTEN3 C6_ATTEN4 C6_ATTEN5 C20 C21 C22 C23 C24 C25 C26 C30 C40 C41: library part "Cap - SMT Small"
CONT: "Header, 8-Pin, Dual row"
D1 D2 D3 D4 D5: "+12 to +32 dBm RF Limiter"
DP1 DP2 DP3 DP4 DP5 DP6 DP7 DP8 DP9 DP10 DP11 DP12 DP13 DP14 DP15 DP16: "T 1 3/4 LED"
EMI_IN IN OSC OUT T2-A T2-B TONE: "RF Coaxial PCB Connector, MMCX; Thru-Hole, Vertical Mount Plug,  50 Ohm Impedance"
L1 L2: "Surface Mount 10 MHz to 10 GHz Bias Tee"
LC1 LC2 LC3 LC4 LC5 LC6 LC7 LC8 LC9 LC10: library part "MEM2012F - Signal Filter", "Signal Line 3-terminal Filters"
N1: "SMT Noise Diode"
R1 R2: library part "RES Semi"
R1_ATTEN1 R1_ATTEN2 R1_ATTEN3 R1_ATTEN4 R1_ATTEN5 R2_ATTEN1 R2_ATTEN2 R2_ATTEN3 R2_ATTEN4 R2_ATTEN5 R3 R3_ATTEN1 R3_ATTEN2 R3_ATTEN3 R3_ATTEN4 R3_ATTEN5 R4_ATTEN1 R4_ATTEN2 R4_ATTEN3 R4_ATTEN4 R4_ATTEN5 R5_ATTEN1 R5_ATTEN2 R5_ATTEN3 R5_ATTEN4 R5_ATTEN5 R6_ATTEN1 R6_ATTEN2 R6_ATTEN3 R6_ATTEN4 R6_ATTEN5 R7_ATTEN1 R7_ATTEN2 R7_ATTEN3 R7_ATTEN4 R7_ATTEN5 R20 R21 R22 R23 R24 R25 R26 R31 RL1 RL2 RL3 RL4 RL5 RL6 RL7 RL8 RL9 RL10 RL11 RL12 RL13 RL14 RL15 RL16: "Semiconductor Resistor"
U1: "Surface Mount Directional Coupler"
U1_ATTEN1 U1_ATTEN2 U1_ATTEN3 U1_ATTEN4 U1_ATTEN5: "31.5 dB, 0.5 dB Step 6 Bit, Serial Control Interface, Single Positive Supply Voltage"
U2 U8: library part JSW6-33DR+, "SP6T RF Switch 50? 10 to 2700 MHz"
U3 U4: "Low Noise, High IP3 Monolithic Amplifier"
U10: "8-Bit Shift Register with Output Latch"

## Free pads (board coordinates)
  round 250 hole 140: 0(1200,3800) 0(1200,4300) 0(1200,5800) 0(2700,3800) 1(1200,1200) 1(2700,1200) 1(6300,1200) 1(6300,3800) 1(6300,4300) 1(6300,5800)

## Via types
v1: diameter 40, hole 20, Top Layer to Gnd 2, tented both sides, 596 vias
v2: diameter 25, hole 13, Top Layer to Gnd 2, tented both sides, 454 vias
v3: diameter 25, hole 13, Top Layer to Gnd 2, 45 vias
v4: diameter 19.68, hole 7.87, Top Layer to Gnd 2, tented bottom, 8 vias
v5: diameter 45, hole 25, Top Layer to Gnd 2, tented both sides, 2 vias

## Nets (pads, with @x,y where several pads share a name; then routed paths per layer and width w, separated by ;. In a path a pad name is that pad's centre, name@x,y a point inside that pad or via, vN(x,y) a via of type N, cw(c..) or ccw(c..) an arc to the next point about the centre after c; other vN are vias at no path point)
3V3: C4_ATTEN1.2 C4_ATTEN2.2 C4_ATTEN3.2 C4_ATTEN4.2 C4_ATTEN5.2 C6_ATTEN1.2 C6_ATTEN2.2 C6_ATTEN3.2 C6_ATTEN4.2 C6_ATTEN5.2 C9.2 C10.2 C12.2 C13.2 C18.2 C20.2 C30.2 C40.1 CONT.5 CONT.6 L1.3 L2.3 R1_ATTEN1.2 R1_ATTEN2.2 R1_ATTEN3.2 R1_ATTEN4.2 R1_ATTEN5.2 R2_ATTEN1.2 R2_ATTEN2.2 R2_ATTEN3.2 R2_ATTEN4.2 R2_ATTEN5.2 R3_ATTEN1.2 R3_ATTEN2.2 R3_ATTEN3.2 R3_ATTEN4.2 R3_ATTEN5.2 R4_ATTEN1.2 R4_ATTEN2.2 R4_ATTEN3.2 R4_ATTEN4.2 R4_ATTEN5.2 R5_ATTEN1.2 R5_ATTEN2.2 R5_ATTEN3.2 R5_ATTEN4.2 R5_ATTEN5.2 R6_ATTEN1.2 R6_ATTEN2.2 R6_ATTEN3.2 R6_ATTEN4.2 R6_ATTEN5.2 R20.2 R31.2 RL9.1 U1_ATTEN1.6 U1_ATTEN1.9 U1_ATTEN1.13 U1_ATTEN2.6 U1_ATTEN2.9 U1_ATTEN2.13 U1_ATTEN3.6 U1_ATTEN3.9 U1_ATTEN3.13 U1_ATTEN4.6 U1_ATTEN4.9 U1_ATTEN4.13 U1_ATTEN5.6 U1_ATTEN5.9 U1_ATTEN5.13 U10.10 U10.16 | length 5209
  Top Layer w6: RL9.1@4930,1502.56 v1(4930,1575)
  Top Layer w7: R31.2@2252.56,2550 C30.2@2297.44,2550 v2(2297.44,2502.56) ; v2(2477.56,2552.56) R4_ATTEN4.2@2525,2552.56 R6_ATTEN4.2@2600,2552.56 R5_ATTEN4.2@2675,2552.56 ; v2(2525,3325) R4_ATTEN5.2@2525,3277.56 R6_ATTEN5.2@2600,3277.56 R5_ATTEN5.2@2675,3277.56 ; v2(2747.46,2122.23) C6_ATTEN4.2@2747.46,2169.67 ; v2(2747.46,2847.23) C6_ATTEN5.2@2747.46,2894.67 ; R1_ATTEN4.2@2825,2552.56 R3_ATTEN4.2@2900,2552.56 R2_ATTEN4.2@2975,2552.56 v2(3022.44,2552.56) ; R1_ATTEN5.2@2825,3277.56 R3_ATTEN5.2@2900,3277.56 R2_ATTEN5.2@2975,3277.56 v2(2975,3325) ; v2(2952.57,2122.23) C4_ATTEN4.2@2952.57,2169.67 ; v2(2952.57,2847.23) C4_ATTEN5.2@2952.57,2894.67 ; v2(3376.98,2357.89) R4_ATTEN1.2@3424.43,2357.89 R6_ATTEN1.2@3499.43,2357.89 R5_ATTEN1.2@3574.43,2357.89 ; v2(3377.56,1735.12) R4_ATTEN2.2@3425,1735.12 R6_ATTEN2.2@3500,1735.12 R5_ATTEN2.2@3575,1735.12 ; v2(3646.88,1927.56) C6_ATTEN1.2@3646.88,1975 ; v2(3647.46,1304.79) C6_ATTEN2.2@3647.46,1352.23 ; R1_ATTEN1.2@3724.43,2357.89 R3_ATTEN1.2@3799.43,2357.89 R2_ATTEN1.2@3874.43,2357.89 v2(3921.87,2357.89) ; R1_ATTEN2.2@3725,1735.12 R3_ATTEN2.2@3800,1735.12 R2_ATTEN2.2@3875,1735.12 v2(3875,1782.56) ; v2(3852,1927.56) C4_ATTEN1.2@3852,1975 ; v2(3852.57,1304.79) C4_ATTEN2.2@3852.57,1352.23 ; v2(3877.56,2722.44) C20.2@3877.56,2675 R20.2@3922.44,2675 ; v2(4869.98,2855.77) R4_ATTEN3.2@4869.98,2808.33 R5_ATTEN3.2@4979.98,2808.33 ; v2(5052.44,2378) C6_ATTEN3.2@5052.44,2425.44 ; v2(5095.83,1700) U10.10@5158.27,1700 ; R1_ATTEN3.2@5129.98,2808.33 R2_ATTEN3.2@5239.98,2808.33 v2(5239.98,2855.77) ; U10.16@5158.27,2000 5138.74,2000 5127.56,2011.18 C18.2@5127.56,2100 v2(5175,2100) ; v2(5257.56,2378) C4_ATTEN3.2@5257.56,2425.44
  Top Layer w8: U1_ATTEN4.6@2710.63,2252.36 2710.63,2206.5 2747.46,2169.67 2769.68,2191.9 U1_ATTEN4.9@2769.68,2252.36 ; U1_ATTEN5.6@2710.63,2977.36 2710.63,2931.5 2747.46,2894.67 2769.68,2916.9 U1_ATTEN5.9@2769.68,2977.36 ; U1_ATTEN4.13@2822.64,2325 2844.68,2325 2952.57,2217.11 C4_ATTEN4.2@2952.57,2169.67 ; U1_ATTEN5.13@2822.64,3050 2844.68,3050 2952.57,2942.11 C4_ATTEN5.2@2952.57,2894.67 ; U1_ATTEN1.6@3610.06,2057.69 3610.06,2011.83 C6_ATTEN1.2@3646.88,1975 3669.11,1997.23 U1_ATTEN1.9@3669.11,2057.69 ; U1_ATTEN2.6@3610.63,1434.92 3610.63,1389.05 C6_ATTEN2.2@3647.46,1352.23 3669.69,1374.46 U1_ATTEN2.9@3669.69,1434.92 ; U1_ATTEN1.13@3722.06,2130.33 3744.11,2130.33 3852,2022.44 C4_ATTEN1.2@3852,1975 ; U1_ATTEN2.13@3722.64,1507.56 cw(c3722.64,1377.62) 3746.99,1505.26 cw(c3722.64,1377.62) 3850.27,1401.97 cw(c3722.64,1377.62) 3852.57,1377.62 C4_ATTEN2.2@3852.57,1352.23 ; U1_ATTEN3.6@5015.61,2508.13 5015.61,2462.27 C6_ATTEN3.2@5052.44,2425.44 5074.67,2447.67 U1_ATTEN3.9@5074.67,2508.13 ; U1_ATTEN3.13@5127.62,2580.77 5149.67,2580.77 5257.56,2472.88 C4_ATTEN3.2@5257.56,2425.44
  Top Layer w15: CONT.5@5775,1604 v2(5775,1670) v2(5775,1820) CONT.6@5775,1886
  other v2: 5775,1540 5775,1950 4700,2775 4730,2775 4760,2775 5670,2775 5700,2775 5730,2775 6149.88,3390 6149.88,3420 6149.88,3450 6149.88,3480 6149.88,3510
15V: C41.1 CONT.3 CONT.4 R3.2 RL10.1 | length 4187.4
  Top Layer w10: RL10.1@5005,1505 5060,1505
  Top Layer w15: R3.2@3300,1778.15 2902.17,1778.15 C41.1@2900,1775.98 3035,1640.98 3035,1360 3170,1225 v5(3340,1225) ; v5(4080,1225) 5015,1225 5060,1270 5060,1535 5120,1595 5195,1595 5230,1630 5230,1700 5280,1750 5675,1750 ; v2(5675,1670) 5675,1750 ; v2(5675,1820) 5675,1750
  Interconnects w15: v5(3340,1225) v5(4080,1225)
  other v2: 5675,1538 5675,1950
CLK: CONT.12 LC8.3 LC9.3 | length 700.7
  Top Layer w6: LC9.3@5993.31,2125 6075,2043.31 v2(6075,1952) ; LC8.3@6025,1393.31 6125,1493.31 6125,1720 6075,1770 v2(6075,1820) ; CONT.12@6075,1886 CONT.12@6075,1891
CS_1: CONT.14 LC10.3 | length 464.3
  Top Layer w6: LC10.3@5993.31,2275 6175,2093.31 v2(6175,1952) CONT.14@6175,1891 CONT.14@6175,1886
  other v2: 6175,1820
CS_2: CONT.7 LC4.3 | length 224.4
  Top Layer w6: 5725,1405.12 5774.88,1455 5825,1455 5875,1505 v2(5875,1538)
  other v2: 5875,1670
CS_3: CONT.9 LC3.3 | length 212.1
  Top Layer w6: LC3.3@5825,1393.31 CONT.9@5975,1543.31
  other v2: 5975,1538 5975,1670